# EAGLE board LED-mini35-SHIM-x2 (EAGLE 9.6.2)
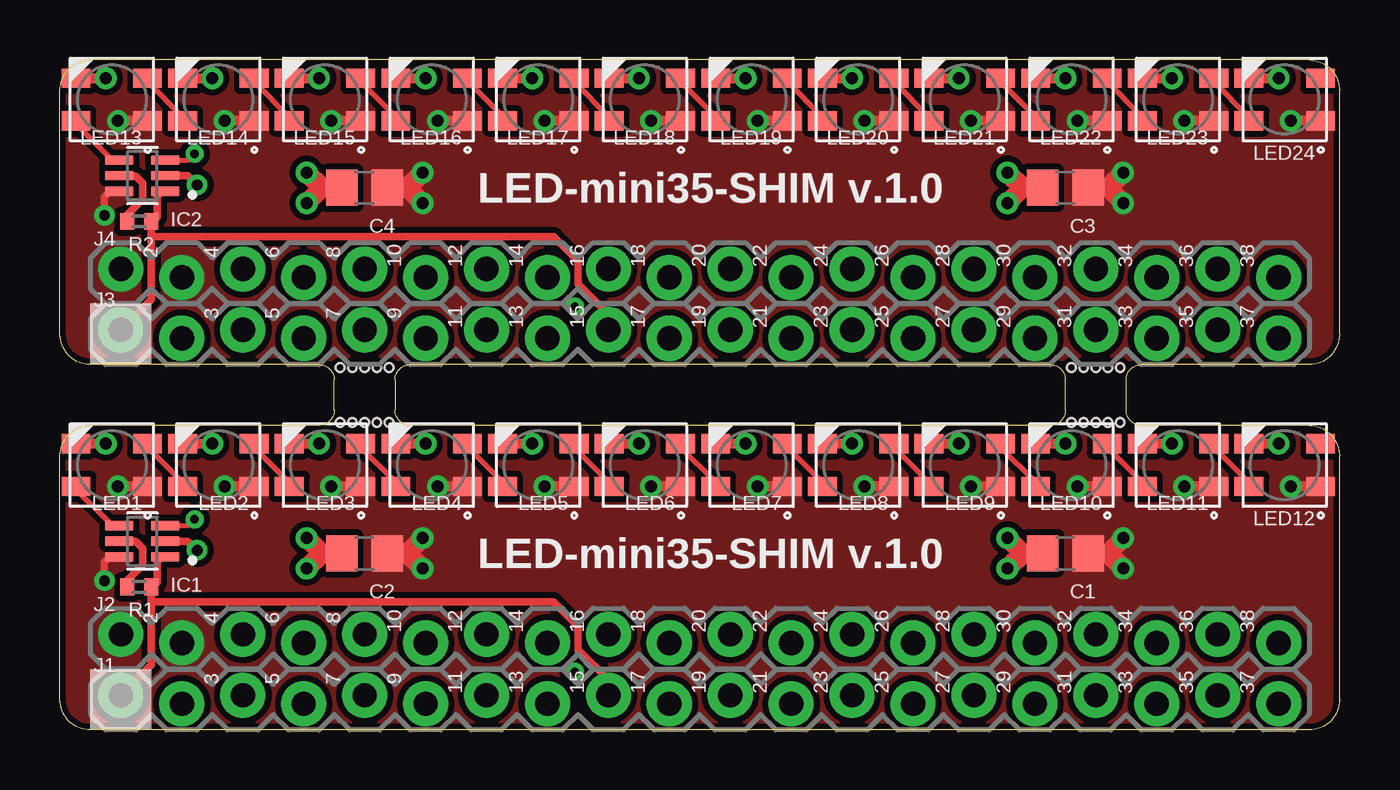
[diagram p0: board, top side]
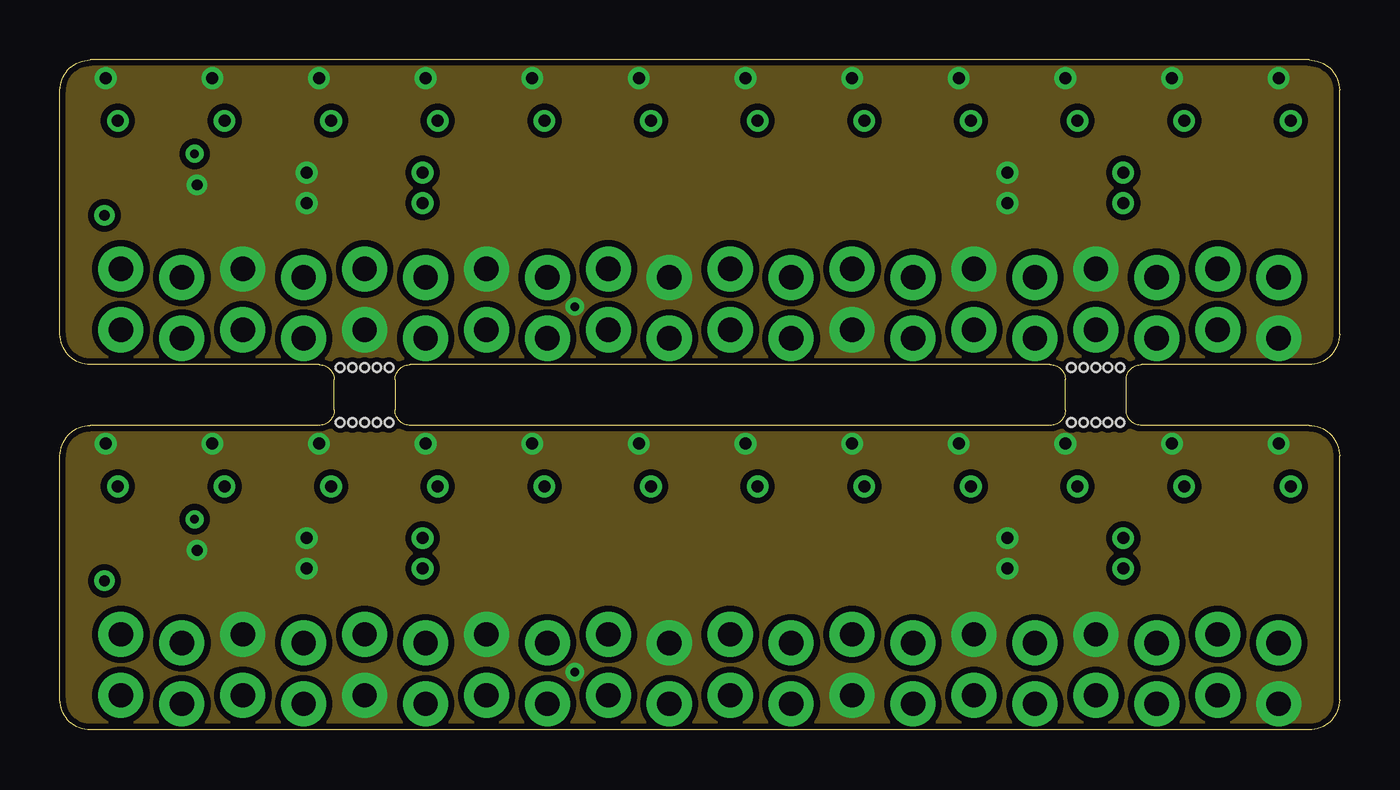
[diagram p1: board, inner layer Route2]
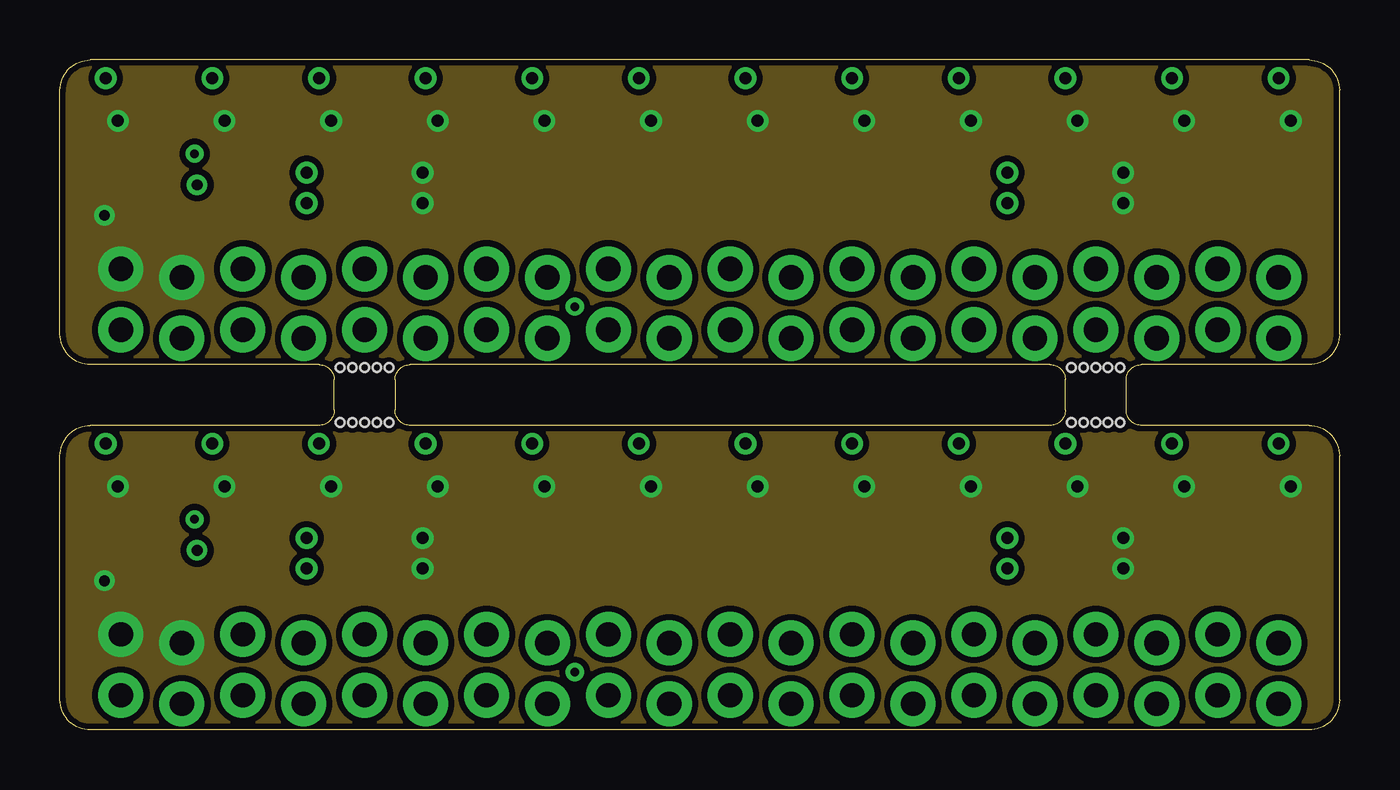
[diagram p2: board, inner layer Route15]
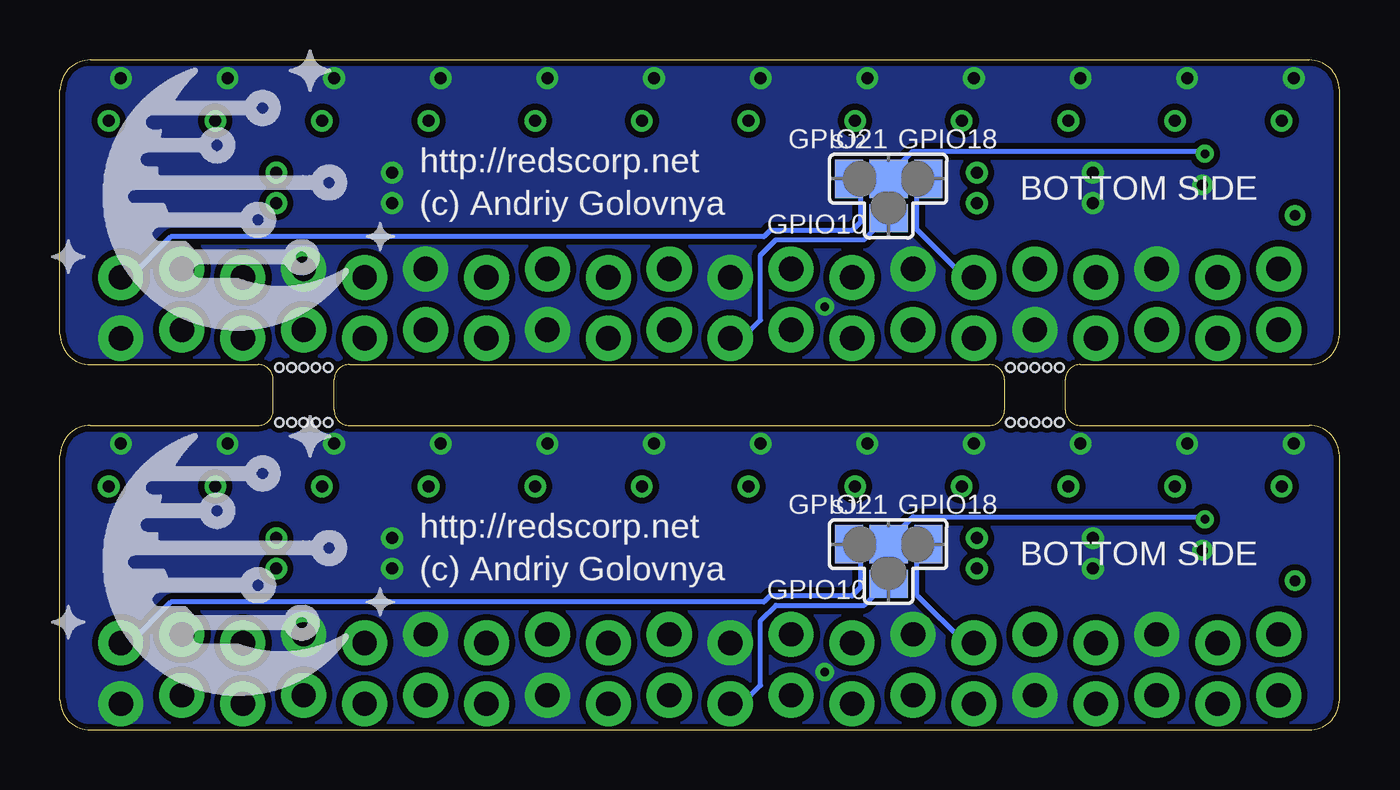
[diagram p3: board, bottom side, seen from below]

Size 53.34 x 27.94 mm. Coordinates in mm from the lower left corner, seen from the top.
Outline: 53.34,1.27 53.34,11.43 arc90 52.07,12.7 45.09,12.7 arc-90 44.45,13.34 44.45,14.61 arc-90 45.09,15.24 52.07,15.24 arc90 53.34,16.51 53.34,26.67 arc90 52.07,27.94 1.27,27.94 arc90 0,26.67 0,16.51 arc90 1.27,15.24 10.79,15.24 arc-90 11.43,14.61 11.43,13.34 arc-90 10.79,12.7 1.27,12.7 arc90 0,11.43 0,1.27 arc90 1.27,0 52.07,0 arc90 53.34,1.27
Outline: 41.27,12.7 14.61,12.7 arc-90 13.97,13.34 13.97,14.61 arc-90 14.61,15.24 41.27,15.24 arc-90 41.91,14.61 41.91,13.34 arc-90 41.27,12.7
Copper layers (1+2*15+16): Top 0.035mm / dielectric 0.2mm / Route2 0.035mm / dielectric 1.5mm / Route15 0.035mm / dielectric 0.2mm / Bottom 0.035mm
Design rules "default *": minimum track width 6mil, minimum drill 0.35mm, track to track 6mil, track to pad 6mil, pad to pad 6mil, via to via 6mil, smd to smd 6mil, copper to edge 6mil, drill to drill 6mil, minimum pad ring 10mil, minimum via ring 8mil, stop-mask expansion 4mil, vias tented up to drill 20mil, thermal gap 10mil
Holes 0.35 mm at 12.7,15.11 13.21,15.11 13.72,15.11 12.19,15.11 11.68,15.11 12.7,12.83 13.21,12.83 13.72,12.83 12.19,12.83 11.68,12.83 43.18,15.11 43.69,15.11 44.2,15.11 42.67,15.11 42.16,15.11 43.18,12.83 43.69,12.83 44.2,12.83 42.67,12.83 42.16,12.83

## Footprints (pad centres in the part's own frame; a part is rotated, then mirrored left to right if it is on the bottom)
C0805 = smd 1.3 x 1.5: 1 -0.95,0; 2 0.95,0
SOT65P210X110-6N = smd 1.19 x 0.4: 1 -0.96,0.65; 2 -0.96,0; 3 -0.96,-0.65; 4 0.96,-0.65; 5 0.96,0; 6 0.96,0.65
1X20_LOCK = drill 1.016 pad 1.88: 1 0,0.178; 2 2.54,-0.178; 3 5.08,0.178; 4 7.62,-0.178; 5 10.16,0.178; 6 12.7,-0.178; 7 15.24,0.178; 8 17.78,-0.178; 9 20.32,0.178; 10 22.86,-0.178; 11 25.4,0.178; 12 27.94,-0.178; 13 30.48,0.178; 14 33.02,-0.178; 15 35.56,0.178; 16 38.1,-0.178; 17 40.64,0.178; 18 43.18,-0.178; 19 45.72,0.178; 20 48.26,-0.178
WS2812X-MINI = smd 1.2 x 0.8: DI 1.49,0.89; DO -1.49,-0.89; GND 1.49,-0.89; VDD -1.49,0.89
R0402 = smd 0.6 x 0.7: 1 -0.5,0; 2 0.5,0
SJ_3 = smd 1.168 x 1.6: 1 -1.651,0; 3 1.651,0 | smd 1.6 x 1.6: 2 0,0 | smd 1.6 x 1.168: 4 0,-1.651

## Placement (x,y rotation side)
C1  10uF  [C0805]  41.91,7.37 180 top
C2  10uF  [C0805]  12.7,7.37 180 top
C3  10uF  [C0805]  41.91,22.61 180 top
C4  10uF  [C0805]  12.7,22.61 180 top
IC1  TXB0101DCKR  [SOT65P210X110-6N]  3.43,7.87 180 top
IC2  TXB0101DCKR  [SOT65P210X110-6N]  3.43,23.11 180 top
J1  [1X20_LOCK]  2.54,1.27 0 top
J2  [1X20_LOCK]  2.54,3.81 0 top
J3  [1X20_LOCK]  2.54,16.51 0 top
J4  [1X20_LOCK]  2.54,19.05 0 top
LED1  WS2812B-MINI  [WS2812X-MINI]  2.16,11.05 180 top
LED2  WS2812B-MINI  [WS2812X-MINI]  6.6,11.05 180 top
LED3  WS2812B-MINI  [WS2812X-MINI]  11.05,11.05 180 top
LED4  WS2812B-MINI  [WS2812X-MINI]  15.49,11.05 180 top
LED5  WS2812B-MINI  [WS2812X-MINI]  19.94,11.05 180 top
LED6  WS2812B-MINI  [WS2812X-MINI]  24.38,11.05 180 top
LED7  WS2812B-MINI  [WS2812X-MINI]  28.83,11.05 180 top
LED8  WS2812B-MINI  [WS2812X-MINI]  33.27,11.05 180 top
LED9  WS2812B-MINI  [WS2812X-MINI]  37.72,11.05 180 top
LED10  WS2812B-MINI  [WS2812X-MINI]  42.16,11.05 180 top
LED11  WS2812B-MINI  [WS2812X-MINI]  46.61,11.05 180 top
LED12  WS2812B-MINI  [WS2812X-MINI]  51.05,11.05 180 top
LED13  WS2812B-MINI  [WS2812X-MINI]  2.16,26.29 180 top
LED14  WS2812B-MINI  [WS2812X-MINI]  6.6,26.29 180 top
LED15  WS2812B-MINI  [WS2812X-MINI]  11.05,26.29 180 top
LED16  WS2812B-MINI  [WS2812X-MINI]  15.49,26.29 180 top
LED17  WS2812B-MINI  [WS2812X-MINI]  19.94,26.29 180 top
LED18  WS2812B-MINI  [WS2812X-MINI]  24.38,26.29 180 top
LED19  WS2812B-MINI  [WS2812X-MINI]  28.83,26.29 180 top
LED20  WS2812B-MINI  [WS2812X-MINI]  33.27,26.29 180 top
LED21  WS2812B-MINI  [WS2812X-MINI]  37.72,26.29 180 top
LED22  WS2812B-MINI  [WS2812X-MINI]  42.16,26.29 180 top
LED23  WS2812B-MINI  [WS2812X-MINI]  46.61,26.29 180 top
LED24  WS2812B-MINI  [WS2812X-MINI]  51.05,26.29 180 top
LOGO1  MFDECLOGO_L_10MM  [MFDEC_L_10MM]  54.48,0.51 0 bottom
LOGO2  MFDECLOGO_L_10MM  [MFDEC_L_10MM]  54.48,15.75 0 bottom
R1  10K  [R0402]  3.3,5.97 180 top
R2  10K  [R0402]  3.3,21.21 180 top
SJ1  [SJ_3]  18.8,7.75 0 bottom
SJ2  [SJ_3]  18.8,22.99 0 bottom

## Library data of the parts
C1-C4 = rcl; SPICEPREFIX: C
IC1 IC2 = TXB0101DCKR
J1-J4 = _my_locked_connectors
LED1-LED24 = WS281X
LOGO1 LOGO2 = _my_logos
R1 R2 = rcl; SPICEPREFIX: R
SJ1 SJ2 = _my_jumpers

## Nets
3.3V: IC1.1 J1.1 J1.9 R1.1
3.3V1: IC2.1 J3.1 J3.9 R2.1
5V: C1.1 C2.1 IC1.6 J2.1 J2.2 LED1.VDD LED2.VDD LED3.VDD LED4.VDD LED5.VDD LED6.VDD LED7.VDD LED8.VDD LED9.VDD LED10.VDD LED11.VDD LED12.VDD
5V1: C3.1 C4.1 IC2.6 J4.1 J4.2 LED13.VDD LED14.VDD LED15.VDD LED16.VDD LED17.VDD LED18.VDD LED19.VDD LED20.VDD LED21.VDD LED22.VDD LED23.VDD LED24.VDD
DATA: IC1.3 SJ1.2
DATA1: IC2.3 SJ2.2
DI_FIRST: IC1.4 LED1.DI
DI_FIRST1: IC2.4 LED13.DI
DO_LAST: LED12.DO
DO_LAST1: LED24.DO
GND: C1.2 C2.2 IC1.2 J1.5 J1.13 J1.20 J2.3 J2.7 J2.10 J2.15 J2.17 LED1.GND LED2.GND LED3.GND LED4.GND LED5.GND LED6.GND LED7.GND LED8.GND LED9.GND LED10.GND LED11.GND LED12.GND
GND1: C3.2 C4.2 IC2.2 J3.5 J3.13 J3.20 J4.3 J4.7 J4.10 J4.15 J4.17 LED13.GND LED14.GND LED15.GND LED16.GND LED17.GND LED18.GND LED19.GND LED20.GND LED21.GND LED22.GND LED23.GND LED24.GND
GPIO0: J1.14
GPIO1: J2.14
GPIO2: J1.2
GPIO3: J1.3
GPIO4: J1.4
GPIO5: J1.15
GPIO6: J1.16
GPIO7: J2.13
GPIO8: J2.12
GPIO9: J1.11
GPIO10: J1.10 SJ1.4
GPIO11: J1.12
GPIO12: J2.16
GPIO13: J1.17
GPIO14: J2.4
GPIO15: J2.5
GPIO16: J2.18
GPIO17: J1.6
GPIO18: J2.6 SJ1.3
GPIO19: J1.18
GPIO20: J2.19
GPIO21: J2.20 SJ1.1
GPIO22: J1.8
GPIO23: J2.8
GPIO24: J2.9
GPIO25: J2.11
GPIO26: J1.19
GPIO27: J1.7
GPIO28: J3.2
GPIO29: J3.3
GPIO30: J3.4
GPIO31: J3.6
GPIO32: J3.7
GPIO33: J3.8
GPIO34: J3.10 SJ2.4
GPIO35: J3.11
GPIO36: J3.12
GPIO37: J3.14
GPIO38: J3.15
GPIO39: J3.16
GPIO40: J3.17
GPIO41: J3.18
GPIO42: J3.19
GPIO43: J4.4
GPIO44: J4.5
GPIO45: J4.6 SJ2.3
GPIO46: J4.8
GPIO47: J4.9
GPIO48: J4.11
GPIO49: J4.12
GPIO50: J4.13
GPIO51: J4.14
GPIO52: J4.16
GPIO53: J4.18
GPIO54: J4.19
GPIO55: J4.20 SJ2.1
N$1: LED1.DO LED2.DI
N$2: LED2.DO LED3.DI
N$3: LED3.DO LED4.DI
N$4: LED4.DO LED5.DI
N$5: LED5.DO LED6.DI
N$6: LED6.DO LED7.DI
N$7: LED7.DO LED8.DI
N$8: LED8.DO LED9.DI
N$9: LED9.DO LED10.DI
N$10: LED10.DO LED11.DI
N$11: LED11.DO LED12.DI
N$12: LED13.DO LED14.DI
N$13: LED14.DO LED15.DI
N$14: LED15.DO LED16.DI
N$15: LED16.DO LED17.DI
N$16: LED17.DO LED18.DI
N$17: LED18.DO LED19.DI
N$18: LED19.DO LED20.DI
N$19: LED20.DO LED21.DI
N$20: LED21.DO LED22.DI
N$21: LED22.DO LED23.DI
N$22: IC2.5 R2.2
N$23: LED23.DO LED24.DI
N$143: IC1.5 R1.2

## Tracks (layer width: path | path; a pad name or v marks a point on that pad's centre or on a via)
3.3V
  Top 0.305: J1.1 3.81,2.72 3.81,5.33 | 3.81,5.33 R1.1 3.88,5.97 4.06,6.15 4.06,7.02 4.26,7.22 IC1.1 | J1.9 22.86,2.08 21.59,3.35 21.59,4.32 20.57,5.33 3.81,5.33
3.3V1
  Top 0.305: J3.1 3.81,17.96 3.81,20.57 | 3.81,20.57 R2.1 3.88,21.21 4.06,21.39 4.06,22.26 4.26,22.46 IC2.1 | J3.9 22.86,17.32 21.59,18.59 21.59,19.56 20.57,20.57 3.81,20.57
5V  (via drill 0.45, 0.5)
  Top 0.305: v1.85,6.22 1.85,6.99 2.09,7.22 IC1.6
  Top 0.406: LED1.VDD v2.41,10.16 | LED2.VDD v6.86,10.16 | LED3.VDD v11.3,10.16 | LED4.VDD v15.75,10.16 | LED5.VDD v20.19,10.16 | LED6.VDD v24.64,10.16 | LED7.VDD v29.08,10.16 | LED8.VDD v33.53,10.16 | LED9.VDD v37.97,10.16 | LED10.VDD v42.42,10.16 | LED11.VDD v46.86,10.16 | LED12.VDD v51.31,10.16
  Top 0.813: 14.48,7.37 v15.11,6.73 | C2.1 14.48,7.37 | 14.48,7.37 v15.11,8 | 43.69,7.37 v44.32,6.73 | C1.1 43.69,7.37 | 43.69,7.37 v44.32,8
  pour Top (isolate 0.254, no thermals): -2.54,0 -2.54,12.7 53.34,12.7 53.34,0
  pour Route15 (isolate 0.254, no thermals): 0,-2.54 0,12.7 53.34,12.7 53.34,-2.54
5V1  (via drill 0.45, 0.5)
  Top 0.305: v1.85,21.46 1.85,22.23 2.09,22.46 IC2.6
  Top 0.406: LED13.VDD v2.41,25.4 | LED14.VDD v6.86,25.4 | LED15.VDD v11.3,25.4 | LED16.VDD v15.75,25.4 | LED17.VDD v20.19,25.4 | LED18.VDD v24.64,25.4 | LED19.VDD v29.08,25.4 | LED20.VDD v33.53,25.4 | LED21.VDD v37.97,25.4 | LED22.VDD v42.42,25.4 | LED23.VDD v46.86,25.4 | LED24.VDD v51.31,25.4
  Top 0.813: 14.48,22.61 v15.11,21.97 | C4.1 14.48,22.61 | 14.48,22.61 v15.11,23.24 | 43.69,22.61 v44.32,21.97 | C3.1 43.69,22.61 | 43.69,22.61 v44.32,23.24
  pour Top (isolate 0.254, no thermals): -2.54,15.24 -2.54,27.94 53.34,27.94 53.34,15.24
  pour Route15 (isolate 0.254, no thermals): 0,15.24 0,27.94 53.34,27.94 53.34,15.24
DATA  (via drill 0.35)
  Top 0.203: IC1.3 5.35,8.52 v5.61,8.79
  Bottom 0.152: 18.8,7.87 SJ1.2
  Bottom 0.203: v5.61,8.79 5.71,8.89 17.78,8.89 18.8,7.87
DATA1  (via drill 0.35)
  Top 0.203: IC2.3 5.35,23.76 v5.61,24.03
  Bottom 0.152: 18.8,23.11 SJ2.2
  Bottom 0.203: v5.61,24.03 5.71,24.13 17.78,24.13 18.8,23.11
DI_FIRST
  Top 0.203: LED1.DI 0.54,10.16 2.18,8.52 IC1.4
DI_FIRST1
  Top 0.203: LED13.DI 0.54,25.4 2.18,23.76 IC2.4
GND  (via drill 0.35, 0.45, 0.5)
  Top 0.305: v5.71,7.49 5.33,7.87 IC1.2
  Top 0.406: LED1.GND v1.9,11.94 v1.91,11.94 | LED2.GND v6.35,11.94 | LED3.GND v10.79,11.94 | LED4.GND v15.24,11.94 | LED5.GND v19.68,11.94 | LED6.GND v24.13,11.94 | LED7.GND v28.57,11.94 | LED8.GND v33.02,11.94 | LED9.GND v37.46,11.94 v37.47,11.94 | LED10.GND v41.91,11.94 | LED11.GND v46.35,11.94 | LED12.GND v50.8,11.94
  Top 0.813: 10.92,7.37 v10.29,8 | C2.2 10.92,7.37 | 10.92,7.37 v10.29,6.73 | 40.13,7.37 v39.5,8 | C1.2 40.13,7.37 | 40.13,7.37 v39.5,6.73
  other vias: 21.46,2.41
  pour Bottom (isolate 0.254, no thermals): 0,0 0,12.7 55.88,12.7 55.88,0
  pour Route2 (isolate 0.254, no thermals): 0,0 0,12.7 53.34,12.7 53.34,0
GND1  (via drill 0.35, 0.45, 0.5)
  Top 0.305: v5.71,22.73 5.33,23.11 IC2.2
  Top 0.406: LED13.GND v1.9,27.18 v1.91,27.18 | LED14.GND v6.35,27.18 | LED15.GND v10.79,27.18 | LED16.GND v15.24,27.18 | LED17.GND v19.68,27.18 | LED18.GND v24.13,27.18 | LED19.GND v28.57,27.18 | LED20.GND v33.02,27.18 | LED21.GND v37.46,27.18 v37.47,27.18 | LED22.GND v41.91,27.18 | LED23.GND v46.35,27.18 | LED24.GND v50.8,27.18
  Top 0.813: 10.92,22.61 v10.29,23.24 | C4.2 10.92,22.61 | 10.92,22.61 v10.29,21.97 | 40.13,22.61 v39.5,23.24 | C3.2 40.13,22.61 | 40.13,22.61 v39.5,21.97
  other vias: 21.46,17.65
  pour Bottom (isolate 0.254, no thermals): 0,15.24 0,27.94 55.88,27.94 55.88,15.24
  pour Route2 (isolate 0.254, no thermals): 0,15.24 0,30.48 53.34,30.48 53.34,15.24
GPIO10
  Bottom 0.152: 18.92,6.1 SJ1.4
  Bottom 0.203: J1.10 24.89,1.09 24.13,1.85 24.13,4.57 23.5,5.21 19.81,5.21 18.92,6.1
GPIO18
  Bottom 0.152: SJ1.3 18.4,7.75
  Bottom 0.203: J2.6 15.62,3.63 17.63,5.64 17.63,7.26 SJ1.3
GPIO21
  Bottom 0.152: SJ1.1 20.45,7.62
  Bottom 0.203: 20.45,7.62 19.96,7.14 19.96,5.94 20.32,5.59 23.75,5.59 24,5.33 48.72,5.33 50.42,3.63 J2.20
GPIO34
  Bottom 0.152: 18.92,21.34 SJ2.4
  Bottom 0.203: J3.10 24.89,16.33 24.13,17.09 24.13,19.81 23.5,20.45 19.81,20.45 18.92,21.34
GPIO45
  Bottom 0.152: SJ2.3 18.4,22.99
  Bottom 0.203: J4.6 15.62,18.87 17.63,20.88 17.63,22.5 SJ2.3
GPIO55
  Bottom 0.152: SJ2.1 20.45,22.86
  Bottom 0.203: 20.45,22.86 19.96,22.38 19.96,21.18 20.32,20.83 23.75,20.83 24,20.57 48.72,20.57 50.42,18.87 J4.20
N$1
  Top 0.203: LED1.DO 3.65,11.79 5.11,10.32 LED2.DI
N$2
  Top 0.203: LED2.DO 8.09,11.79 9.56,10.32 LED3.DI
N$3
  Top 0.203: LED3.DO 12.54,11.79 14,10.32 LED4.DI
N$4
  Top 0.203: LED4.DO 16.98,11.81 18.45,10.35 LED5.DI
N$5
  Top 0.203: LED5.DO 21.43,11.79 22.89,10.32 LED6.DI
N$6
  Top 0.203: LED6.DO 25.87,11.79 27.34,10.32 LED7.DI
N$7
  Top 0.203: LED7.DO 30.32,11.79 31.78,10.32 LED8.DI
N$8
  Top 0.203: LED8.DO 34.76,11.79 36.23,10.32 LED9.DI
N$9
  Top 0.203: LED9.DO 39.21,11.79 40.67,10.32 LED10.DI
N$10
  Top 0.203: LED10.DO 43.65,11.79 45.12,10.32 LED11.DI
N$11
  Top 0.203: LED11.DO 48.1,11.79 49.56,10.32 LED12.DI
N$12
  Top 0.203: LED13.DO 3.65,27.03 5.11,25.56 LED14.DI
N$13
  Top 0.203: LED14.DO 8.09,27.03 9.56,25.56 LED15.DI
N$14
  Top 0.203: LED15.DO 12.54,27.03 14,25.56 LED16.DI
N$15
  Top 0.203: LED16.DO 16.98,27.05 18.45,25.59 LED17.DI
N$16
  Top 0.203: LED17.DO 21.43,27.03 22.89,25.56 LED18.DI
N$17
  Top 0.203: LED18.DO 25.87,27.03 27.34,25.56 LED19.DI
N$18
  Top 0.203: LED19.DO 30.32,27.03 31.78,25.56 LED20.DI
N$19
  Top 0.203: LED20.DO 34.76,27.03 36.23,25.56 LED21.DI
N$20
  Top 0.203: LED21.DO 39.21,27.03 40.67,25.56 LED22.DI
N$21
  Top 0.203: LED22.DO 43.65,27.03 45.12,25.56 LED23.DI
N$22
  Top 0.305: IC2.5 2.49,23.1 3.16,23.1 3.44,22.81 3.44,22.13 2.8,21.49 R2.2
N$23
  Top 0.203: LED23.DO 48.1,27.03 49.56,25.56 LED24.DI
N$143
  Top 0.305: IC1.5 2.49,7.86 3.16,7.86 3.44,7.57 3.44,6.89 2.8,6.25 R1.2

## Text on the board
tPlace: LED-mini35-SHIM v.1.0 | 2 | 4 | 6 | 8 | 10 | 12 | 14 | 16 | 18 | 20 | 22 | 24 | 26 | 28 | 30 | 32 | 34 | 36 | 38 | 3 | 5 | 7 | 9 | 11 | 13 | 15 | 17 | 19 | 21 | 23 | 25 | 27 | 29 | 31 | 33 | 35 | 37 | LED-mini35-SHIM v.1.0 | 2 | 4 | 6 | 8 | 10 | 12 | 14 | 16 | 18 | 20 | 22 | 24 | 26 | 28 | 30 | 32 | 34 | 36 | 38 | 3 | 5 | 7 | 9 | 11 | 13 | 15 | 17 | 19 | 21 | 23 | 25 | 27 | 29 | 31 | 33 | 35 | 37
bPlace: GPIO18 | GPIO21 | http://redscorp.net | BOTTOM SIDE | GPIO10 | (c) Andriy Golovnya | GPIO18 | GPIO21 | http://redscorp.net | BOTTOM SIDE | (c) Andriy Golovnya | GPIO10